# Altium PCB PCB1.PcbDoc (part 1 of 2)
Units mm, origin at the board's own origin, x right, y up, seen from the top; angles counter-clockwise.
Board outline 100 x 91 mm, 2 copper layers (Top Layer, Bottom Layer); 156 components, 114 nets, 531 pads, 381 vias.
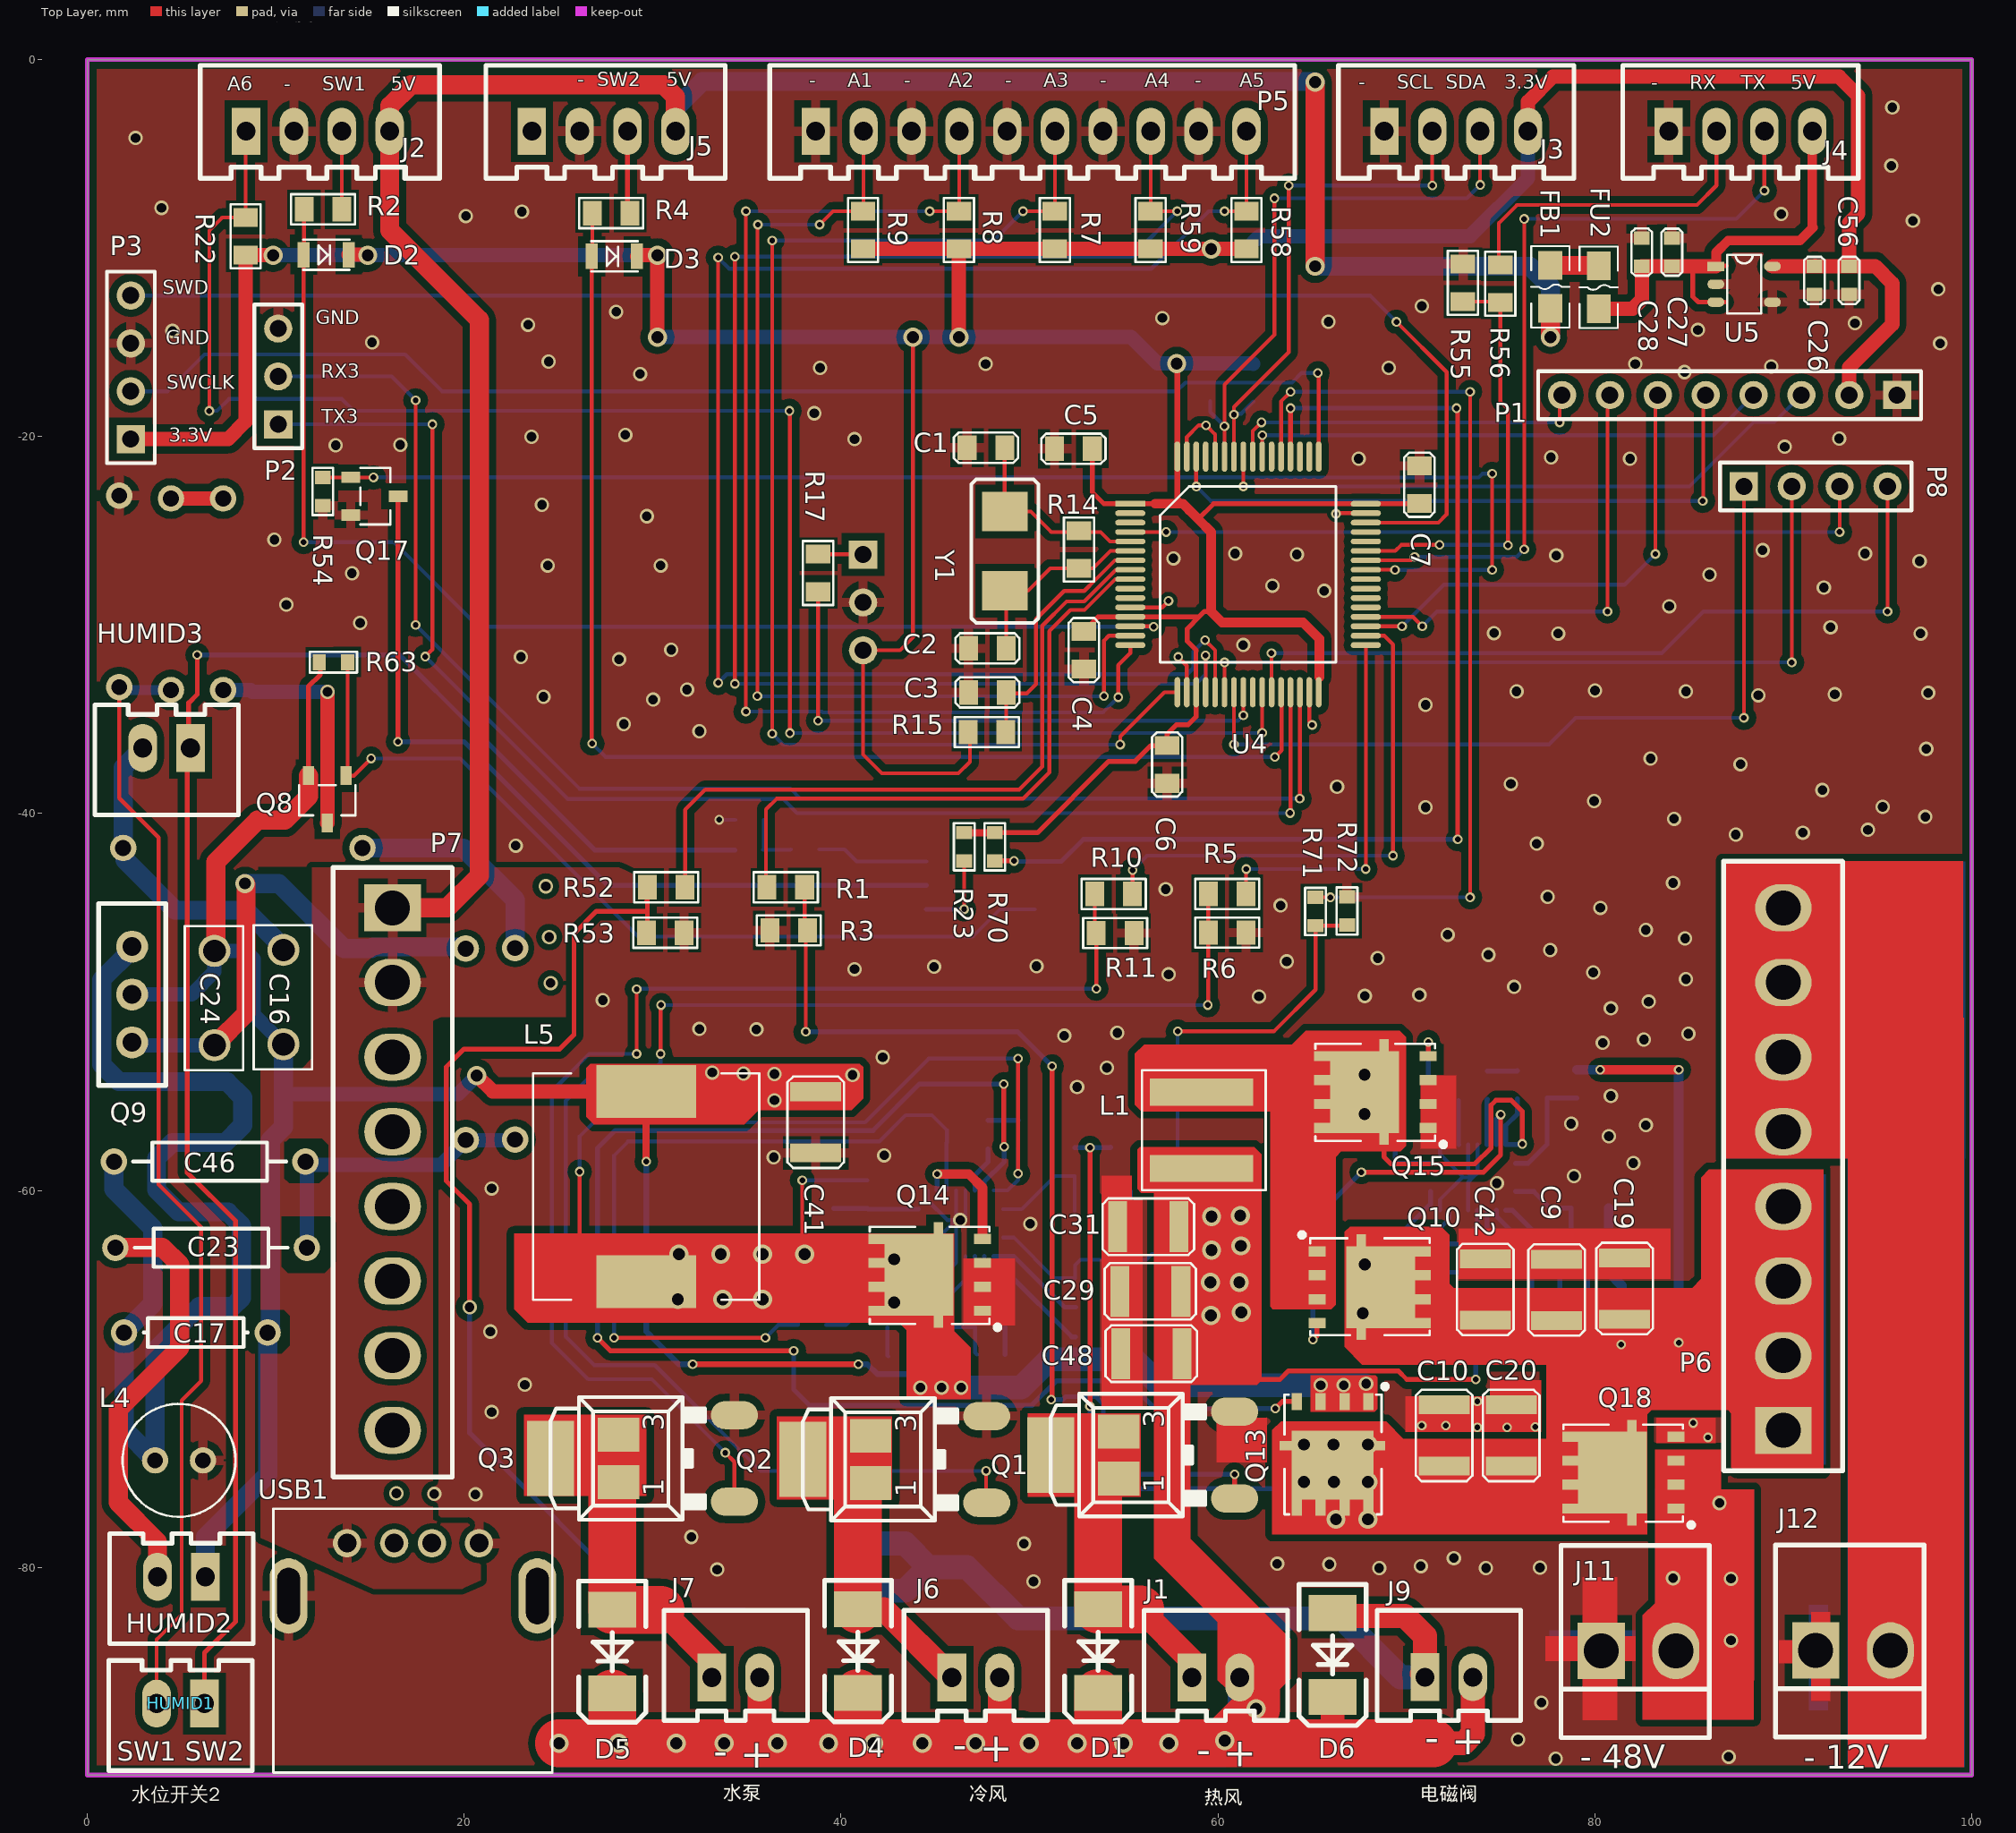
[diagram p0: Top Layer view]
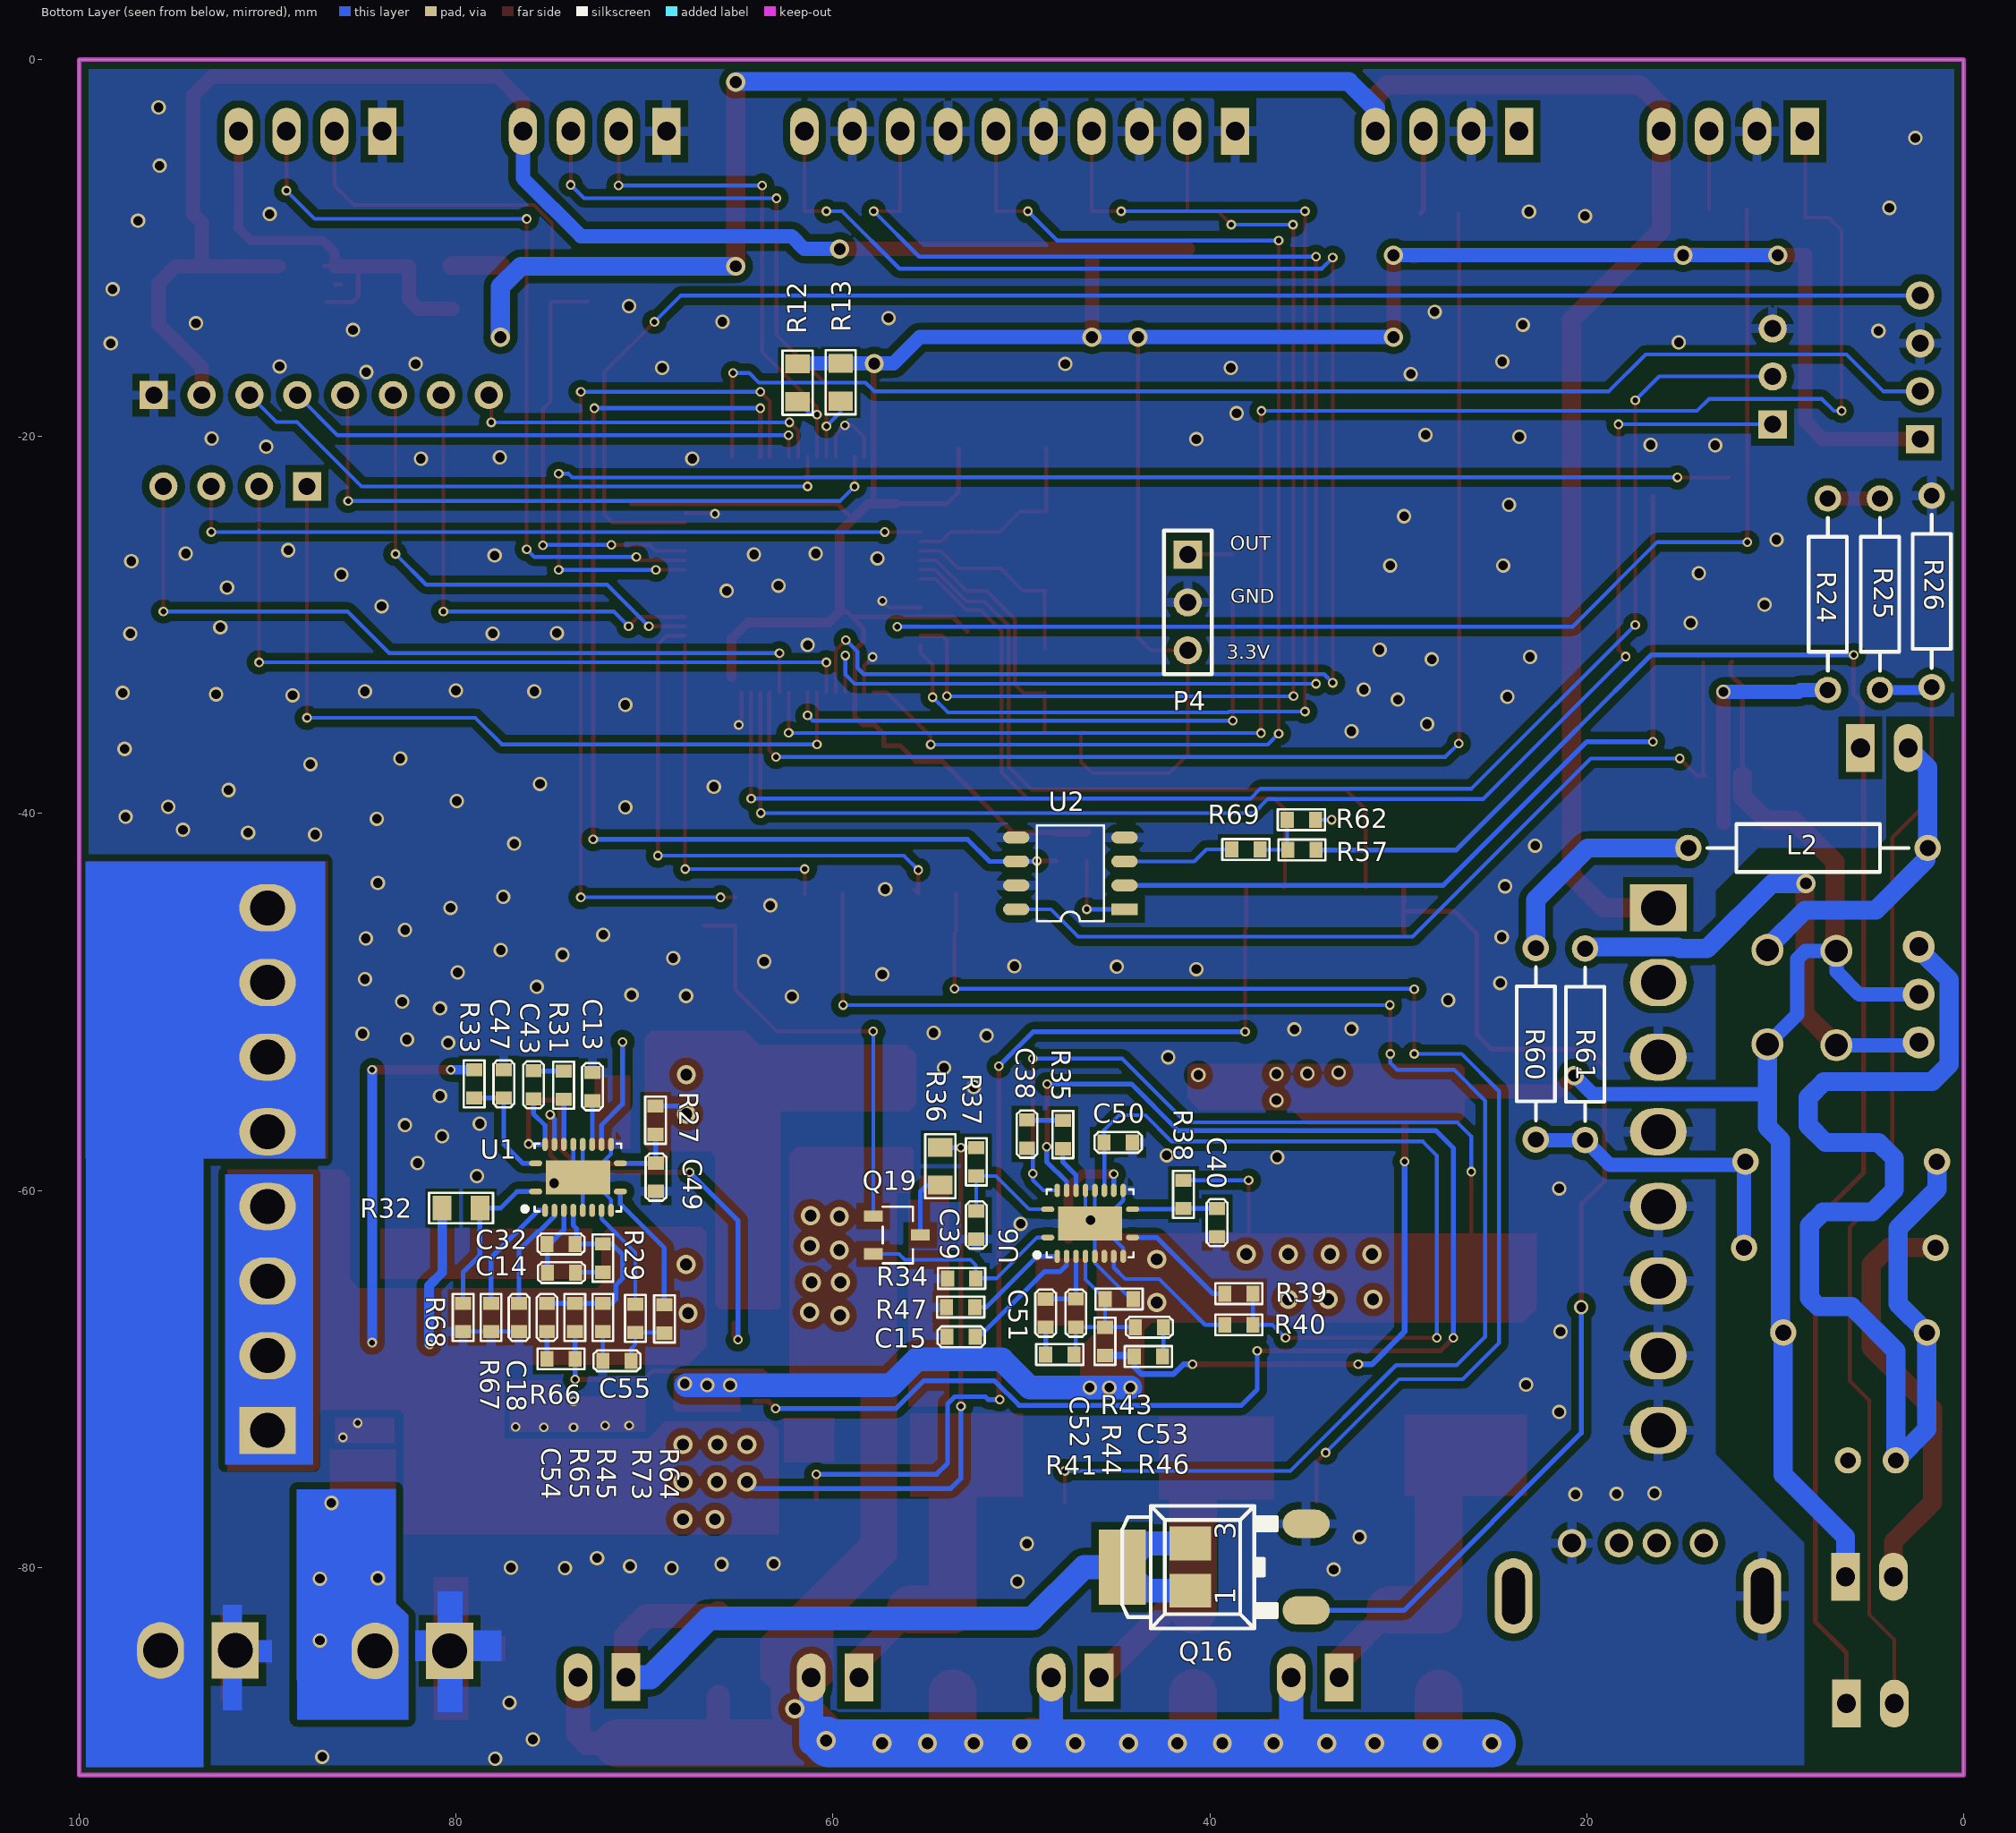
[diagram p1: Bottom Layer view, seen from below]

## Layer stack, top to bottom
Top Layer: signal copper 0.0356
Dielectric: dielectric 0.32, FR-4, Dk 4.8
Bottom Layer: signal copper 0.0356

## Board outline
0,-91.008 100,-91.008 100,-0.008 0,-0.008

## Design rules (kind name [scope] priority, off if disabled: settings)
Clearance Clearance_2 [InNet('+5V')  And InPolygon] p1: gap=0.305
Clearance Clearance_1 [InPoly And InNet(GND)] p2: gap=0.381
Clearance [All] p3: gap=0.127
MinimumSolderMaskSliver [All] p1: minsoldermaskwidth=0.025
PolygonConnect PolygonConnect_1 [IsVia] p1: connectstyle=Direct reliefconductorwidth=0.254 reliefentries=4 polygonreliefangle="90 Angle"
PolygonConnect [All] p2: connectstyle=Relief reliefconductorwidth=0.508 reliefentries=4 polygonreliefangle="90 Angle"
RoutingVias [All] p1: holewidth=0.711 width=1.27 viastyle="Through Hole" minholewidth=0.711 minwidth=1.27 maxholewidth=0.711 maxwidth=1.27
SilkToSilkClearance [All] p1: silktosilkclearance=0.025
SilkscreenOverComponentPads [All] p1: minsilkscreentomaskgap=0.025
SolderMaskExpansion [All] p1: expansion=0.102
Width [All] p1: maxlimit=5.08 minlimit=0.152 preferedwidth=0.254
25 further rules are at their usual default settings.

## Classes and differential pairs
component class Humidifier: C10 C15 C16 C17 C20 C23 C24 C38 C39 C40 C41 C46 C50 C51 C52 C53 HUMID1 HUMID2 HUMID3 J11 L2 L4 L5 Q8 Q9 Q13 Q14 Q17 Q18 Q19 R23 R24 R25 R26 R34 R35 R36 R37 R38 R39 R40 R41 R43 R44 R46 R47 R54 R57 R60 R61 R62 R63 R69 R70 R71 R72 U2 U6
component class cpu: C1 C2 C3 C4 C5 C6 C7 P1 P2 P3 P4 P8 R12 R13 R14 R15 R17 R55 R56 U4 Y1
component class Connector: D1 D2 D3 D4 D5 D6 J1 J2 J3 J4 J5 J6 J7 J9 P5 Q1 Q2 Q3 Q16 R1 R2 R3 R4 R5 R6 R7 R8 R9 R10 R11 R22 R52 R53 R58 R59
component class POWER: C9 C13 C14 C18 C19 C25 C26 C27 C28 C29 C31 C32 C42 C43 C47 C48 C49 C54 C55 C56 FB1 FU2 J12 L1 P6 P7 Q10 Q15 R27 R28 R29 R31 R32 R33 R45 R64 R65 R66 R67 R68 R73 U1 U5 USB1

## Components (designator, comment, footprint, x,y, rotation, side; value= is the part's Value field where it differs from the comment)
C1 "22pF" 0805c 46.685,-20.599 r0 top
C2 "22pF" 0805c 46.761,-31.242 r0 top
C3 "100nF" 0805c 46.761,-33.579 r0 top
C4 "100nF" 0805c 52.883,-32.334 r90 top
C5 "100nF" 0805c 51.333,-20.65 r0 top
C6 "100nF" 0805c 57.302,-38.405 r90 top
C7 "100nF" 0805c 70.688,-21.565 r270 top
C9 "GRM32ER72A225KA35L" 1210C 77.972,-66.904 r90 top
C10 "GRM32ER72A225KA35L" 1210C 72.003,-74.625 r90 top
C13 "EMK107BB7225MA-T" 0603C 72.765,-55.245 r90 bottom
C14 "18nF/16V" 0603C 75.153,-64.364 r180 bottom
C15 "18nF/16V" 0603C 52.445,-67.767 r0 bottom
C16 "10nF/630V" CAP_5MM 10.408,-47.244 r270 top
C17 "1.5nF/630V" AXIAL-0.3 5.76,-67.539 r0 top
C18 "18nF/16V" 0603C 76.658,-65.988 r270 bottom
C19 "GRM32ER72A225KA35L" 1210C 81.579,-66.827 r90 top
C20 "GRM32ER72A225KA35L" 1210C 75.559,-74.625 r90 top
C23 "47nF/630V" AXIAL-0.4 6.573,-63.043 r180 top
C24 "100p/1000v" CAP_5MM 6.751,-47.295 r270 top
C26 "10uF/10V" 0603C 91.653,-12.471 r90 top
C27 "10uF/10V" 0603C 84.089,-9.474 r270 top
C28 "0.1uF/10V" 0603C 82.489,-10.973 r90 top
C29 "GRM32ER71A476KE15L" 1210C 58.033,-65.354 r180 top
C31 "GRM32ER71A476KE15L" 1210C 57.932,-61.925 r180 top
C32 "1pF/16V" 0603C 75.178,-62.84 r180 bottom
C38 "0.1uF/25V" 0603C 49.702,-56.261 r270 bottom
C39 "C1608X7S2A104K080AB" 0603C 52.394,-62.586 r90 bottom
C40 "3pF/100V" 0603C 39.618,-62.459 r90 bottom
C41 "GRM32ER71A476KE15L" 1210C 38.653,-54.762 r270 top
C42 "GRM32ER72A225KA35L" 1210C 74.188,-66.878 r90 top
C43 "0.1uF/25V" 0603C 75.889,-53.645 r270 bottom
C46 "47nF/630V" AXIAL-0.4 6.497,-58.471 r180 top
C47 "C1608X7S2A104K080AB" 0603C 77.464,-53.594 r270 bottom
C48 "GRM32ER71A476KE15L" 1210C 58.084,-68.656 r180 top
C49 "6.8pF/100V" 0603C 69.387,-60.046 r90 bottom
C50 "EMK107BB7225MA-T" 0603C 45.613,-57.455 r180 bottom
C51 "22nF/16V" 0603C 48.711,-65.761 r270 bottom
C52 "1pF/16V" 0603C 47.111,-65.759 r270 bottom
C53 "1.5nF/16V" 0603C 43.962,-67.258 r180 bottom
C54 "470pF/16V" 0603C 75.175,-65.988 r270 bottom
C55 "2.2uF/16V" 0603C 70.714,-69.037 r0 bottom
C56 "0.1uF/10V" 0603C 93.487,-10.971 r270 top
D1 "1N4004" D7227 53.638,-82.22 r270 top
D2 "1N4148" sod323 11.475,-10.363 r0 top
D3 "1N4148" sod323 26.772,-10.439 r0 top
D4 "1N4004" D7227 40.901,-82.22 r270 top
D5 "1N4004" D7227 27.858,-82.245 r270 top
D6 "1N4004" D7227 66.085,-82.423 r270 top
FB1 "100R1A" F0805 77.638,-13.208 r90 top
FU2 "500mA/6V" F0805 80.203,-10.947 r270 top
HUMID1 "Header 2" SIP-2L 4.947,-87.224 r180 top
HUMID2 "Header 2" SIP-2L 4.998,-80.493 r180 top
HUMID3 "" SIP-2L 4.211,-36.525 r180 top
J1 "OUT-A" SIP-2L 59.887,-85.839 r0 top
J2 "IIC" SIP-4L 8.427,-3.81 r0 top
J3 "IIC" SIP-4L 68.828,-3.81 r0 top
J4 "USRT" SIP-4L 83.916,-3.81 r0 top
J5 "IIC" SIP-4L 23.591,-3.81 r0 top
J6 "OUT-B" SIP-2L 47.149,-85.839 r0 top
J7 "OUT-C" SIP-2L 34.411,-85.839 r0 top
J9 "OUT-C" SIP-2L 72.257,-85.827 r0 top
J11 "SIP2-2.54" CH3.96-2P 84.297,-84.43 r0 top
J12 "OUT-B" CH3.96-2P 95.682,-84.404 r0 top
L1 "XAL6060-682MEB" XAL6060 59.125,-54.788 r270 top
L2 "100uH" AXIAL-0.5 8.255,-41.834 r180 bottom
L4 "47uH" 6*8 4.871,-74.32 r180 top
L5 "SRR1210-560M" SRR1210 29.661,-64.846 r90 top
P1 "Header 8" HDR1X8 96.037,-17.805 r180 top
P2 "Header 3" HDR1X3 10.135,-19.355 r90 top
P3 "Header 4" HDR1X4 2.311,-20.142 r90 top
P4 "Header 3" HDR1X3 41.168,-26.264 r270 bottom
P5 "Header 10" SIP-10L 38.653,-3.81 r0 top
P6 "Header 8" CH3.96-8P 90,-72.728 r90 top locked
P7 "Header 8" CH3.96-8P 16.2,-45.008 r270 top locked
P8 "Header 4" HDR1X4 87.909,-22.651 r0 top
Q1 "NCE4060K" TO-252-3S 54.63,-74.041 r90 top
Q2 "NCE4060K" TO-252-3S 41.472,-74.27 r90 top
Q3 "NCE4060K" TO-252-3S 28.087,-74.219 r90 top
Q8 "SI2343" SOT23-3 13.736,-37.998 r90 top
Q9 "BU406" to220 2.382,-52.146 r90 top
Q10 "BSC117N08NS5ATMA1" "PowerPAK SO-8" 64.307,-62.56 r0 top
Q13 "BSC117N08NS5ATMA1" "PowerPAK SO-8" 68.655,-70.249 r270 top
Q14 "BSC037N08NS5ATMA1" "PowerPAK SO-8" 48.457,-67.056 r180 top
Q15 "BSC037N08NS5ATMA1" "PowerPAK SO-8" 72.105,-57.353 r180 top
Q16 "NCE4060K" TO-252-3S 41.142,-79.985 r90 bottom
Q17 "S8050" SOT23-3 13.99,-22.174 r180 top
Q18 "SI7489DP" "PowerPAK SO-8" 85.262,-77.546 r180 top
Q19 "S8050" SOT23-3 57.861,-61.366 r0 bottom
R1 "22R" 0805R 36.068,-43.917 r0 top
R2 "10K" 0805R 13.507,-7.95 r180 top
R3 "470K" 0805R 36.22,-46.203 r0 top
R4 "10K" 0805R 28.804,-8.153 r180 top
R5 "22R" 0805R 61.488,-44.272 r180 top
R6 "470k" 0805R 61.488,-46.323 r180 top
R7 "10K" 0805R 51.34,-8.052 r270 top
R8 "10K" 0805R 46.254,-8.052 r270 top
R9 "10K" 0805R 41.168,-8.052 r270 top
R10 "22R" 0805R 55.468,-44.272 r180 top
R11 "470k" 0805R 55.544,-46.348 r180 top
R12 "2K" 0805R 61.874,-16.154 r270 bottom
R13 "2K" 0805R 59.588,-16.129 r270 bottom
R14 "1MR" 0805R 52.629,-27 r90 top
R15 "10K" 0805R 46.736,-35.687 r0 top
R17 "100" 0805R 38.78,-28.245 r90 top
R22 "10K" 0805R 8.402,-8.382 r270 top
R23 "100" 0603R 46.533,-42.519 r90 top
R24 "1.2K" AXIAL-0.4 7.208,-28.372 r270 bottom
R25 "1.2K" AXIAL-0.4 4.439,-28.372 r270 bottom
R26 "4.7K" AXIAL-0.4 1.696,-28.219 r270 bottom
R27 "1.65K" 0603R 69.412,-55.524 r270 bottom
R29 "2.37K" 0603R 72.206,-62.84 r270 bottom
R31 "0" 0603R 74.289,-53.67 r270 bottom
R32 "121K" 0805R 78.734,-60.935 r0 bottom
R33 "2.2" 0603R 79.039,-53.594 r270 bottom
R34 "8.06K" 0603R 53.918,-64.668 r180 bottom
R35 "0" 0603R 47.797,-56.286 r270 bottom
R36 "121K" 0805R 54.299,-59.715 r90 bottom
R37 "2.2" 0603R 52.394,-57.734 r270 bottom
R38 "2.1K" 0603R 41.396,-59.461 r270 bottom
R39 "20K" 0603R 39.212,-65.481 r180 bottom
R40 "20K" 0603R 39.212,-67.132 r180 bottom
R41 "4.99K" 0603R 47.213,-68.706 r0 bottom
R43 "665" 0603R 45.562,-65.759 r180 bottom
R44 "18K" 0603R 45.562,-68.756 r90 bottom
R45 "1.27K" 0603R 72.21,-65.988 r270 bottom
R46 "4.64" 0603R 44.012,-68.807 r180 bottom
R47 "39.2K" 0603R 53.969,-66.192 r180 bottom
R52 "22R" 0805R 31.725,-43.917 r180 top
R53 "470k" 0805R 31.674,-46.33 r180 top
R54 "4.7K" 0603r 12.497,-23.673 r90 top
R55 "20K" 0805R 73,-10.846 r270 top
R56 "10K" 0805R 74.981,-10.897 r270 top
R57 "100k" 0603r 35.865,-41.935 r180 bottom
R58 "10K" 0805R 61.513,-8.052 r270 top
R59 "10K" 0805R 56.427,-10.052 r90 top
R60 "10" AXIAL-0.4 22.702,-52.222 r90 bottom
R61 "2.2" AXIAL-0.4 20.086,-52.248 r90 bottom
R62 "20K" 0603r 34.392,-40.335 r0 bottom
R63 "1K" 0603R 13.812,-31.979 r180 top
R64 "20K" 0603R 68.936,-66.065 r270 bottom
R65 "18K" 0603R 73.692,-67.488 r90 bottom
R66 "19.1" 0603R 73.68,-68.936 r0 bottom
R67 "28.7K" 0603R 78.14,-67.488 r90 bottom
R68 "8.06K" 0603R 79.623,-67.488 r90 bottom
R69 "1K" 0603R 38.837,-41.91 r180 bottom
R70 "100" 0603R 48.158,-42.519 r90 top
R71 "1K" 0603R 65.176,-44.45 r270 top
R72 "20K" 0603R 66.853,-45.923 r90 top
R73 "20K" 0603R 70.485,-66.04 r270 bottom
U1 "LM5145" QFN050P600-8N 73.527,-59.309 r90 bottom
U2 "TLP521-2" SO-8 44.526,-45.085 r0 bottom
U4 "STM32F103R8T6" LQFP-64 55.347,-23.571 r0 top
U5 "TLV70233DBVR" SOT23-5(DBV) 86.42,-10.973 r0 top
U6 "LM5145" QFN050P600-8N 46.349,-61.747 r90 bottom
USB1 "Header 5" USB-A 13.786,-78.715 r0 top
Y1 "8MHz" SMT5032 48.692,-26.086 r90 top

## Footprints (in the part's own frame and the unit in brackets; to place one, negate y for a bottom-side part, rotate by r counter-clockwise, add the part's x,y. Pads: shape width x height; smd on the part's side, far side on the other; paste and mask are expansions set on the pad)
6*8 [mil]
  round 55 hole 33: 1(50,0) 2(-50,0)
  silkscreen extent -118,-118 118,118
0603C [mm]
  rect 0.7x0.85 smd: 1(0,0) 2(1.5,0)
  silkscreen extent -0.5,-0.55 2,0.55
0603R [mm]
  rect 0.7x0.85 smd: 1(0,0) 2(1.5,0)
  silkscreen extent -0.5,-0.55 2,0.55
0603r [mm]
  rect 0.7x0.85 smd: 1(0,0) 2(1.5,0)
  silkscreen extent -0.5,-0.55 2,0.55
0805c [mm]
  rect 1x1.3 smd: 1(0,0) 2(2,0)
  silkscreen extent -0.7,-0.8 2.7,0.8
0805R [mm]
  rect 1x1.3 smd: 1(0,0) 2(2,0)
  silkscreen extent -0.7,-0.8 2.7,0.8
1210C [mm]
  rect 1x2.7 smd: 1(0,0) 2(3.25,0)
  silkscreen extent -0.8,-1.5 4.05,1.5
AXIAL-0.3 [mm] "Axial Device, Thru-Hole; 2 Leads; 0.3 in Pin Spacing"
  round 1.4 hole 0.85: 1(-3.81,0) 2(3.81,0)
  silkscreen extent -2.77,-0.76 2.77,0.76
AXIAL-0.4 [mm] "Axial Device, Thru-Hole; 2 Leads; 0.4 in Pin Spacing"
  round 1.4 hole 0.85: 1(-5.08,0) 2(5.08,0)
  silkscreen extent -4.06,-1.02 4.06,1.02
AXIAL-0.5 [mm] "Axial Device, Thru-Hole; 2 Leads; 0.5 in Pin Spacing"
  round 1.4 hole 0.85: 1(-6.35,0) 2(6.35,0)
  silkscreen extent -5.33,-1.27 5.33,1.27
CAP_5MM [mm]
  round 1.7 hole 1.2: 1(0,0) 2(5,0)
  silkscreen extent -1.32,-1.57 6.32,1.52
CH3.96-2P [mm]
  rect 2.5x3 hole 1.85: 1(-3.96,0)
  oval 2.5x3 hole 1.85: 2(0,0)
  silkscreen extent -6.1,-4.6 1.78,5.59, body extent -5.94,-3.91 1.92,4.59, height 10.9
CH3.96-8P [mm]
  rect 2.5x3 hole 1.85: 1(0,0)
  oval 2.5x3 hole 1.85: 2(3.96,0) 3(7.92,0) 4(11.88,0) 5(15.84,0) 6(19.8,0) 7(23.76,0) 8(27.72,0)
  silkscreen extent -2.14,-3.15 30.2,3.18
D7227 [mm]
  rect 1.905x2.54 smd: A(0,0) K(4.445,0)
  silkscreen extent -1.52,-1.78 5.97,1.78, body extent -0.56,-1.45 4.93,1.35, height 2.24
F0805 [mil]
  rect 60x50 smd: 1(0,0) 2(90,0)
  silkscreen extent -40,-40 130,40, body extent 4,-23 82,24, height 20
HDR1X3 [mm] "Connector; Header; 3 Position"
  rect 1.5x1.5 hole 0.9: 1(0,0)
  round 1.5 hole 0.9: 2(2.54,0) 3(5.08,0)
  silkscreen extent -1.27,-1.27 6.35,1.27
HDR1X4 [mm] "Connector; Header; 4 Position"
  rect 1.5x1.5 hole 0.9: 1(0,0)
  round 1.5 hole 0.9: 2(2.54,0) 3(5.08,0) 4(7.62,0)
  silkscreen extent -1.27,-1.27 8.89,1.27
HDR1X8 [mm] "Connector; Header; 8 Position"
  rect 1.5x1.5 hole 0.9: 1(0,0)
  round 1.5 hole 0.9: 2(2.54,0) 3(5.08,0) 4(7.62,0) 5(10.16,0) 6(12.7,0) 7(15.24,0) 8(17.78,0)
  silkscreen extent -1.27,-1.27 19.05,1.27
LQFP-64 [mm]
  rect 1.6x0.3 smd: 1(0,0)
  oval 1.6x0.3 smd: 2(0,-0.5) 3(0,-1) 4(0,-1.5) 5(0,-2) 6(0,-2.5) 7(0,-3) 8(0,-3.5) 9(0,-4) 10(0,-4.5) 11(0,-5) 12(0,-5.5) 13(0,-6) 14(0,-6.5) 15(0,-7) 16(0,-7.5) 33(12.5,-7.5) 34(12.5,-7) 35(12.5,-6.5) 36(12.5,-6) 37(12.5,-5.5) 38(12.5,-5) 39(12.5,-4.5) 40(12.5,-4) 41(12.5,-3.5) 42(12.5,-3) 43(12.5,-2.5) 44(12.5,-2) 45(12.5,-1.5) 46(12.5,-1) 47(12.5,-0.5) 48(12.5,0)
  oval 0.3x1.6 smd: 17(2.5,-10) 18(3,-10) 19(3.5,-10) 20(4,-10) 21(4.5,-10) 22(5,-10) 23(5.5,-10) 24(6,-10) 25(6.5,-10) 26(7,-10) 27(7.5,-10) 28(8,-10) 29(8.5,-10) 30(9,-10) 31(9.5,-10) 32(10,-10) 49(10,2.5) 50(9.5,2.5) 51(9,2.5) 52(8.5,2.5) 53(8,2.5) 54(7.5,2.5) 55(7,2.5) 56(6.5,2.5) 57(6,2.5) 58(5.5,2.5) 59(5,2.5) 60(4.5,2.5) 61(4,2.5) 62(3.5,2.5) 63(3,2.5) 64(2.5,2.5)
  silkscreen extent 1.59,-8.41 10.91,0.91
"PowerPAK SO-8" [mm]
  rect 0.9x0.54 smd: 1(0.95,-0.67) 2(0.95,-1.94) 3(0.95,-3.21) 4(0.95,-4.48) 5(6.548,-4.48) 6(6.548,-3.21) 7(6.548,-1.94) 8(6.548,-0.67)
  rect 0.5x1.6 smd: 5(3.3,-4.575) 8(3.3,-0.575)
  rect 3.66x2.5 smd: 5(4.325,-3.495)
  rect 3.66x2 smd: 8(4.325,-1.401)
  silkscreen extent 0.03,-5.12 6.93,0.33
QFN050P600-8N [mm]
  oval 0.3x0.7 smd: 1(-0.75,2.25) 10(-0.75,-2.25) 11(0.75,-2.25) 20(0.75,2.25)
  oval 0.7x0.3 smd: 2(-1.75,1.75) 3(-1.75,1.25) 4(-1.75,0.75) 5(-1.75,0.25) 6(-1.75,-0.25) 7(-1.75,-0.75) 8(-1.75,-1.25) 9(-1.75,-1.75) 12(1.75,-1.75) 13(1.75,-1.25) 14(1.75,-0.75) 15(1.75,-0.25) 16(1.75,0.25) 17(1.75,0.75) 18(1.75,1.25) 19(1.75,1.75)
  rect 1.8x3.4 smd: 21(0,0)
  silkscreen extent -1.8,-2.3 1.8,2.94, body extent -1.8,-2.3 1.8,2.3, height 0.8
SIP-2L [mil]
  rect 60x100 hole 40: 1(-50,0)
  oval 60x100 hole 40: 2(50,0)
  silkscreen extent -150,-90 150,140
SIP-4L [mm]
  rect 1.5x2.5 hole 1: 1(0,0)
  oval 1.5x2.5 hole 1: 2(2.54,0) 3(5.08,0) 4(7.62,0)
  silkscreen extent -2.44,-2.5 10.26,3.5
SIP-10L [mm]
  rect 1.5x2.5 hole 1: 1(0,0)
  oval 1.5x2.5 hole 1: 2(2.54,0) 3(5.08,0) 4(7.62,0) 5(10.16,0) 6(12.7,0) 7(15.24,0) 8(17.78,0) 9(20.32,0) 10(22.86,0)
  silkscreen extent -2.44,-2.5 25.43,3.5
SMT5032 [mm]
  rect 2.1x2.4 smd: 1(-2.1,0) 2(2.1,0)
  silkscreen extent -3.81,-1.78 3.81,1.78
SO-8 [mil]
  rect 55x25 smd: 1(0,0)
  oval 55x25 smd: 2(0,-50) 3(0,-100) 4(0,-150) 5(226.38,-150) 6(226.38,-100) 7(226.38,-50) 8(226.38,0)
  silkscreen extent 43,-175 183,25
sod323 [mm]
  rect 0.65x1.35 smd: A(0,0) K(2.4,0)
  silkscreen extent -0.03,-0.8 2.44,0.8
SOT23-3 [mm]
  rect 1x0.6 smd: 1(0,0) 2(0,2) 3(-2.5,1)
  silkscreen extent -2.1,-0.5 -0.5,2.5
SOT23-5(DBV) [mm]
  rect 0.9x0.5 smd: 1(0,0)
  oval 0.9x0.5 smd: 2(0,-0.95) 3(0,-1.9) 4(3,-1.9) 5(3,0)
  silkscreen extent 0.6,-2.5 2.4,0.6
SRR1210 [mm]
  rect 2.8x5.3 smd: 1(0,0) 2(10.1,0)
  silkscreen extent -0.95,-6 11.05,6
to220 [mm]
  round 1.7 hole 1: 1(0,0) 2(2.54,0) 3(5.08,0)
  silkscreen extent -2.29,-1.78 7.37,1.78
TO-252-3S [mm]
  oval 1.5x2.5 smd: 1(-2.3,-6.25) 3(2.3,-6.25)
  rect 1.8x2.2 smd: 2(-1.25,-0.1) 2(1.25,-0.1)
  rect 4x2.5 smd: 2(0,3.5)
  silkscreen extent -3.25,-4.7 3.25,3.5
USB-A [mm]
  round 1.5 hole 1: 1(0,0) 2(2.5,0) 3(4.5,0) 4(7,0)
  oval 2x4 hole 1.2 slot 3 at 90 deg: 5(-3.1,-2.8) 6(10.1,-2.8)
  silkscreen extent -3.91,-12.17 10.89,1.83
XAL6060 [mm]
  rect 1.43x5.5 smd: 1(0,0) 2(4.04,0)
  silkscreen extent -1.17,-3.15 5.19,3.41

## Part data
C1 C2 C3 C4 C5 C6 C7: library part CAP, "Capacitor"
C9 C10 C13 C14 C15 C18 C19 C20 C29 C31 C32 C38 C39 C40 C41 C42 C43 C47 C48 C49 C50 C51 C52 C53 C54 C55: library part 0.01UF, "CCX85-103"
C16 C17 C23 C24 C26 C27 C28 C46 C56: library part Cap, "Capacitor"
D1 D4 D5 D6: library part Diode_2, "Default Diode"
D2 D3: library part Diode, "Default Diode"
FB1 FU2: library part FUSE2, "Fuse"
HUMID1 HUMID2: "Header, 2-Pin"
HUMID3: library part "Header 2", "Header, 2-Pin"
J1 J6 J7 J9 J12: library part CON2, "Connector"
J2 J3 J4 J5: library part SIP4-2.54, "CN-SIP4-2.54"
J11: "CN-SIP2-2.54"
L1 L5: library part INDUCTOR
L2 L4: library part Inductor, "Inductor"
P1 P6 P7: "Header, 8-Pin"
P2 P4: "Header, 3-Pin"
P3 P8: "Header, 4-Pin"
P5: "Header, 10-Pin"
Q1 Q2 Q3 Q16: "NMOSFET"
Q8: library part BUK92150-55A, "BUK92150-55A"
Q9: library part NPN, "NPN Bipolar Transistor"
Q10 Q13 Q14 Q15 Q18: library part Si4004DY, "Si4004DY"
Q17 Q19: library part NPN
R1 R2 R3 R4 R5 R6 R7 R8 R9 R10 R11 R22 R52 R53 R58 R59: library part 1K, "CR85-102J"
R12 R13 R14 R15 R17 R27 R29 R31 R35 R38 R41 R43 R44 R45 R46 R55 R56 R65 R66: library part Res3, "Resistor"
R23 R63 R69 R70: library part R, "R"
R24 R25 R26 R32 R33 R34 R36 R37 R39 R40 R47 R54 R57 R60 R61 R62 R64 R67 R68 R71 R72 R73: library part "Res Semi", "Semiconductor Resistor"
U4: "STM32 ARM-based 32-bit MCU with 64 Kbytes Flash, 64-pin LQFP, Industrial Temperature"
U5: library part TLV70230DBVR
USB1: "Header, 5-Pin"
Y1: library part XTAL, "Crystal Oscillator"

## Via types
v1: diameter 0.762, hole 0.508, Top Layer to Bottom Layer, tented both sides, 182 vias
v2: diameter 0.508, hole 0.305, Top Layer to Bottom Layer, tented both sides, 142 vias
v3: diameter 1.016, hole 0.635, Top Layer to Bottom Layer, tented both sides, 57 vias

## Nets (pads, with @x,y where several pads share a name; then routed paths per layer and width w, separated by ;. In a path a pad name is that pad's centre, name@x,y a point inside that pad or via, vN(x,y) a via of type N, cw(c..) or ccw(c..) an arc to the next point about the centre after c; other vN are vias at no path point)
+5V: FB1.1 J2.4 J5.4 P7.1 P7.2 USB1.1 | length 128.9
  Top Layer w0.762: J2.4@16.047,-3.81 J2.4@16.149,-3.708 ; P7.1@16.2,-45.008 P7.1@16.353,-45.161
  Top Layer w1.016: P7.1@16.2,-45.008 19.101,-45.008 20.803,-43.307 20.803,-13.818 16.047,-9.062 J2.4@16.047,-3.81 16.047,-2.47 17.17,-1.346 30.582,-1.346 31.211,-1.975 J5.4@31.211,-3.81 ; v3(65.151,-10.973) v3(65.151,-1.194) ; FB1.1@77.638,-13.208 77.638,-14.722 v3(77.648,-14.732)
  Bottom Layer w1.016: J5.4@31.211,-3.81 31.211,-2.597 32.639,-1.168 65.126,-1.168 v3(65.151,-1.194) ; v3(65.151,-10.973) 76.553,-10.973 77.638,-12.058 77.638,-14.722 v3(77.648,-14.732)
+12V: C29.1 C31.1 C48.1 D1.K D4.K D5.K D6.K J1.2 J6.2 J7.2 J9.2 L1.2 R65.1 R66.1 | length 136.2
  Top Layer w0.254: 61.564,-69.748 61.843,-70.028 63.291,-70.028 63.748,-69.571 69.565,-69.571 70.022,-70.028 v2(73.68,-70.028)
  Top Layer w1.27: 35.681,-89.332 J7.2@35.681,-85.839 ; 48.419,-89.332 J6.2@48.419,-85.839 ; D6.K@66.085,-86.868 66.085,-89.103 66.314,-89.332 ; 71.419,-89.332 73.022,-89.332 73.527,-88.827 J9.2@73.527,-85.827
  Top Layer w2.54: v3(25.039,-89.332) 27.655,-89.332 ; D5.K@27.858,-86.69 27.858,-89.129 27.655,-89.332 ; v3@36.57,-89.281 v3@36.519,-89.332 ; D4.K@40.901,-86.665 40.901,-89.142 40.71,-89.332 ; 49.448,-89.23 49.346,-89.332 ; 53.638,-89.256 D1.K@53.638,-86.665 ; 62.021,-84.404 v3(62.021,-87.503) v3@60.192,-89.332 ; 71.419,-89.332 66.314,-89.332 v3@60.192,-89.332 ; 27.655,-89.332 v3(28.188,-89.332) v3(31.262,-89.332) v3(33.802,-89.332) 35.681,-89.332 v3@36.519,-89.332 ; v3@36.519,-89.332 v3(36.621,-89.332) v3(39.339,-89.332) 40.71,-89.332 ; 40.71,-89.332 v3(41.726,-89.332) v3(44.317,-89.332) v3(47.137,-89.332) 48.419,-89.332 49.346,-89.332 ; 49.346,-89.332 v3(49.981,-89.332) v3(52.521,-89.332) v3(54.985,-89.332) v3(57.398,-89.332) v3@60.192,-89.332
  Bottom Layer w0.254: v2(73.68,-70.028) R66.1@73.68,-68.936 73.68,-67.5 R65.1@73.692,-67.488
  Bottom Layer w1.27: 35.681,-89.332 J7.2@35.681,-85.839 ; 48.419,-89.332 J6.2@48.419,-85.839 ; 61.157,-89.332 J1.2@61.157,-85.839
  Bottom Layer w2.54: v3(25.039,-89.332) v3(28.188,-89.332) v3(31.262,-89.332) v3(33.802,-89.332) 35.681,-89.332 v3(36.621,-89.332) v3(39.339,-89.332) v3(41.726,-89.332) v3(44.317,-89.332) v3(47.137,-89.332) 48.419,-89.332 v3(49.981,-89.332) v3(52.521,-89.332) v3(54.985,-89.332) v3(57.398,-89.332) 60.218,-89.332 v3(60.362,-89.187)
  other v3: 59.633,-66.624 61.234,-66.472 59.608,-64.872 61.132,-64.872 59.659,-63.17 61.208,-62.941 59.659,-61.392 61.183,-61.341
+48V: J11.2 Q18.1 Q18.2 Q18.3
  other v1: 87.224,-83.871 87.224,-80.594 84.15,-80.569 86.614,-76.581
A1: P5.2 R9.1 U4.15 | length 58
  Top Layer w0.203: v2(35.56,-33.782) 35.56,-8.788 v2(35.585,-8.763) ; v2(38.862,-8.763) 39.573,-8.052 R9.1@41.168,-8.052 41.193,-8.026 P5.2@41.193,-3.81 ; v2(53.95,-33.782) 53.95,-30.836 54.214,-30.571 U4.15@55.347,-30.571
  Bottom Layer w0.203: v2(35.56,-33.782) v2(53.95,-33.782) ; v2(35.585,-8.763) v2(38.862,-8.763)
A2: P5.4 R8.1 U4.16 | length 65.2
  Top Layer w0.203: v2(34.95,-34.595) v2(34.95,-8.052) ; v2(44.704,-8.052) R8.1@46.254,-8.052 46.273,-8.033 P5.4@46.273,-3.81 ; v2(54.712,-33.833) 54.712,-32.131 55.347,-31.496 U4.16@55.347,-31.071
  Bottom Layer w0.203: v2(34.95,-34.595) 38.98,-34.595 39.031,-34.646 53.899,-34.646 v2(54.712,-33.833) ; v2(34.95,-8.052) v2(44.704,-8.052)
A3: P5.6 R7.1 U4.17 | length 69.2
  Top Layer w0.203: v2(36.347,-35.763) v2(36.347,-9.601) ; v2(49.657,-8.052) R7.1@51.34,-8.052 51.353,-8.039 P5.6@51.353,-3.81 ; v2(54.813,-36.347) 54.813,-35.916 57.158,-33.571 57.201,-33.571 U4.17@57.847,-33.571
  Bottom Layer w0.203: v2(36.347,-35.763) 36.932,-36.347 v2(54.813,-36.347) ; v2(36.347,-9.601) 48.108,-9.601 v2(49.657,-8.052)
A4: P5.8 R59.2 U4.20 | length 80.9
  Top Layer w0.203: v2(34.366,-33.122) v2(34.366,-10.465) ; P5.8@56.433,-3.81 56.433,-8.045 R59.2@56.427,-8.052 v2(57.836,-8.052) ; v2(59.334,-31.623) 59.347,-31.635 U4.20@59.347,-33.571
  Bottom Layer w0.203: v2(34.366,-33.122) 58.852,-33.122 59.334,-32.639 v2(59.334,-31.623) ; v2(34.366,-10.465) 55.423,-10.465 v2(57.836,-8.052)
A5: P5.10 R58.1 U4.21 | length 86.6
  Top Layer w0.203: v2(33.477,-33.071) v2(33.477,-10.516) ; v2(59.309,-30.81) 59.847,-31.348 U4.21@59.847,-33.571 ; v2(60.35,-8.052) R58.1@61.513,-8.052 P5.10@61.513,-3.81
  Bottom Layer w0.203: v2(33.477,-33.071) 33.934,-32.614 58.369,-32.614 58.702,-32.281 58.702,-31.418 v2(59.309,-30.81) ; v2(33.477,-10.516) 34.061,-11.1 56.464,-11.1 59.512,-8.052 v2(60.35,-8.052)
A6: J2.1 R22.1 U4.26 | length 92
  Top Layer w0.203: v2(6.477,-18.644) 6.477,-9.068 7.163,-8.382 R22.1@8.402,-8.382 8.402,-3.835 J2.1@8.427,-3.81 ; v2(37.281,-35.738) 37.281,-18.649 v2@37.287,-18.644 ; U4.26@62.347,-33.571 v2(62.347,-35.727) v2@62.357,-35.738
  Bottom Layer w0.203: v2(6.477,-18.644) 6.883,-18.644 7.518,-18.009 13.513,-18.009 14.148,-18.644 v2(37.262,-18.644) v2@37.287,-18.644 ; v2(37.281,-35.738) v2@62.357,-35.738
BLK: P1.7 U4.36 | length 24.9
  Top Layer w0.203: U4.36@67.847,-29.571 70.341,-29.571 v2(70.841,-30.071) ; v2(80.67,-29.285) 80.67,-17.932 P1.7@80.797,-17.805
  Bottom Layer w0.203: v2(70.841,-30.071) 71.627,-29.285 v2(80.67,-29.285)
CTR_OUT1: R1.1 U4.9 | length 32.9
  Top Layer w0.203: R1.1@36.068,-43.917 36.017,-43.866 36.017,-39.785 36.585,-39.218 49.657,-39.218 51.054,-37.821 51.054,-30.328 52.172,-29.21 52.918,-29.21 54.557,-27.571 U4.9@55.347,-27.571
CTR_OUT2: R5.1 U4.33 | length 19.6
  Top Layer w0.203: v2@61.488,-42.957 R5.1@61.488,-44.272 R5.1@61.538,-44.221 ; v2(67.843,-42.951) 67.847,-42.948 U4.33@67.847,-31.071
  Bottom Layer w0.203: v2(61.493,-42.951) v2(67.843,-42.951)
CTR_OUT3: R10.1 U4.34 | length 28.6
  Top Layer w0.203: v2(55.474,-43.002) 55.468,-43.008 R10.1@55.468,-44.272 R10.1@55.702,-44.038 ; U4.34@67.847,-30.571 68.824,-30.571 69.291,-31.039 v2(69.291,-42.24)
  Bottom Layer w0.203: v2(55.474,-43.002) 56.236,-42.24 v2(69.291,-42.24)
CTR_OUT4: R52.1 U4.8 | length 37.4
  Top Layer w0.203: R52.1@31.719,-43.911 R52.1@31.725,-43.917 31.725,-39.802 32.791,-38.735 49.454,-38.735 50.673,-37.516 50.673,-30.048 51.968,-28.753 52.908,-28.753 54.59,-27.071 U4.8@55.347,-27.071
DC: P1.6 U4.35 | length 25.4
  Top Layer w0.203: U4.35@67.847,-30.071 v2(69.771,-30.071) v2@69.774,-30.074 ; v2@83.185,-26.264 v2(83.21,-26.238) 83.21,-17.932 P1.6@83.337,-17.805
  Bottom Layer w0.203: v2(69.771,-30.071) 71.979,-27.864 81.585,-27.864 v2@83.185,-26.264
GND: C1.1 C2.1 C3.1 C4.1 C5.1 C6.1 C7.1 C9.2 C10.2 C13.2 C15.2 C18.2 C19.2 C20.2 C26.1 C27.1 C28.2 C29.2 C31.2 C39.1 C40.1 C41.2 C42.2 C47.1 C48.2 C49.1 C50.2 C55.2 C56.2 J2.2 J3.1 J4.1 J5.2 J11.1 J12.1 L4.2 P1.1 P2.3 P3.3 P4.2 P5.1 P5.3 P5.5 P5.7 P5.9 P7.3 P7.4 P7.5 P7.6 P7.7 P7.8 Q1.3 Q2.3 Q3.3 Q14.1 Q14.2 Q14.3 Q15.1 Q15.2 Q15.3 Q16.3 Q17.2 Q18.4 R3.1 R6.1 R11.1 R26.1 R34.1 R43.2 R45.2 R47.1 R53.1 R54.1 R55.1 R62.1 R67.1 R68.1 R72.2 U1.6 U1.9 U1.12 U1.15 U1.16 U1.21 U2.4 U2.5 U2.7 U4.12 U4.18 U4.31 U4.47 U4.60 U4.63 U5.2 U5.4 U6.6 U6.9 U6.12 U6.15 U6.16 U6.21 USB1.4 USB1.5 | length 40.7
  Top Layer w0.203: U4.12@55.347,-29.071 57.035,-29.071 v2(57.379,-28.727) ; v2(57.887,-31.699) 58.347,-32.159 U4.18@58.347,-33.571 ; U4.63@58.347,-21.071 58.347,-20.038 58.979,-19.406 v2(59.36,-19.406) 59.847,-19.892 U4.60@59.847,-21.071 ; U4.31@64.847,-33.571 64.847,-35.154 v2(64.999,-35.306) ; v2@66.262,-24.054 66.279,-24.071 U4.47@67.847,-24.071 ; U5.2@86.086,-11.923 U5.2@86.42,-11.923 U5.2@86.356,-11.987
  Bottom Layer w0.203: v2(33.528,-40.335) R62.1@34.392,-40.335 ; R43.2@44.062,-65.759 44.176,-65.759 46.099,-63.836 U6.6@46.099,-63.497 U6.21@46.099,-61.997 ; U6.9@44.599,-63.497 44.599,-63.066 U6.21@45.917,-61.747 ; U6.12@44.599,-59.997 44.599,-60.531 45.638,-61.57 v1(46.324,-61.57) ; U6.21@46.099,-61.345 U6.15@46.099,-59.997 ; U6.21@46.599,-61.497 U6.16@46.599,-59.997 ; U1.9@71.777,-61.059 71.777,-60.505 71.775,-60.503 U1.21@72.968,-59.309 ; U1.12@71.777,-57.559 71.777,-58.067 73.019,-59.309 U1.21@73.527,-59.309 ; C55.2@72.081,-68.986 72.21,-68.858 R45.2@72.21,-67.488 ; U1.6@73.277,-61.059 73.277,-59.559 U1.21@73.527,-59.309 ; U1.15@73.277,-57.559 73.277,-59.059 U1.21@73.527,-59.309 ; U1.16@73.777,-57.559 73.777,-59.059 U1.21@73.527,-59.309 ; C18.2@76.658,-67.488 R67.1@78.14,-67.488 R68.1@79.623,-67.488
  other v1: 77.927,-90.145 87.097,-90.043 75.921,-89.129 77.165,-87.173 50.216,-80.747 33.426,-80.112 68.555,-80.035 74.219,-80.035 77.089,-80.01 70.764,-79.934 65.913,-79.832 63.144,-79.807 72.517,-79.502 49.708,-78.74 32.055,-78.384 20.599,-76.124 18.415,-76.098 16.408,-76.073 21.463,-71.755 23.216,-70.307 21.387,-67.488 50.038,-61.773 21.463,-59.893 74.797,-59.614 78.892,-59.233 82.042,-58.547 36.424,-58.242 42.291,-58.141 80.747,-57.125 82.702,-56.54 78.74,-56.464 80.848,-54.991 52.527,-54.508 54.102,-53.492 42.215,-52.934 80.416,-52.172 82.601,-51.994 51.841,-51.791 84.963,-51.689 54.661,-51.638 35.509,-51.46 32.487,-51.435 80.848,-50.343 82.855,-49.987 27.356,-49.911 62.179,-49.708 67.793,-49.682 70.688,-49.632 75.717,-49.2 24.587,-48.997 84.836,-48.793 57.379,-48.539 79.908,-48.438 40.716,-48.26 44.933,-48.133 50.368,-48.108 63.652,-47.854 68.478,-47.676 74.346,-47.498 77.622,-47.244 84.785,-46.634 24.511,-46.558 72.187,-46.431 82.702,-46.177 80.289,-45.009 63.322,-44.882 77.495,-44.425 57.226,-44.018 24.333,-43.866 84.15,-43.688 22.733,-41.707 76.911,-41.605 87.478,-41.123 91.034,-41.021 94.488,-40.869 84.201,-40.284 97.536,-40.183 71.018,-39.675 95.275,-39.649 79.959,-39.345 92.075,-38.76 66.319,-38.583 75.54,-38.43 87.732,-37.389 82.956,-37.084 97.587,-36.576 32.487,-35.636 28.473,-35.255 71.018,-34.239 30.023,-33.96 24.206,-33.807 88.671,-33.731 92.735,-33.68 97.688,-33.604 75.844,-33.528 84.836,-33.528 80.01,-33.477 31.826,-33.426 28.219,-31.826 23.012,-31.699 30.988,-31.318 61.341,-31.064 78.054,-30.455 97.282,-30.455 74.651,-30.429 92.507,-30.124 14.478,-29.896 83.947,-29.007 10.566,-28.931 65.634,-28.194 92.151,-28.016 62.89,-27.915 86.081,-27.33 14.046,-27.254 24.435,-26.848 30.429,-26.848 97.231,-26.619 57.633,-26.467 77.953,-26.314 64.186,-26.264 60.909,-26.213 94.336,-26.213 88.9,-26.035 9.931,-25.476 29.693,-24.232 24.13,-23.622 67.462,-21.184 81.864,-21.184 77.673,-21.107 90.068,-20.549 13.183,-20.472 16.612,-20.447 40.716,-20.142 92.964,-20.117 23.571,-20.015 28.55,-19.914 38.583,-18.771 29.337,-16.688 84.76,-16.586 38.887,-16.358 69.063,-16.358 89.357,-16.281 47.676,-16.154 82.144,-16.154 24.486,-16.027 98.323,-15.062 15.113,-15.011 4.521,-14.402 85.471,-14.351 23.393,-14.072 93.802,-13.995 65.862,-13.919 57.048,-13.716 28.067,-13.386 70.815,-13.081 98.222,-12.192 96.876,-8.56 20.091,-8.306 89.891,-8.204 23.063,-8.077 3.937,-7.874 95.733,-5.639 2.565,-4.166 95.783,-2.54
  other v2: 86.004,-73.101 73.762,-72.568 75.336,-72.568 76.835,-72.542 70.815,-72.466 72.085,-72.466 85.217,-72.339 73.762,-71.196 66.262,-24.105
HUMID_EN: R71.1 U4.53 | length 48.2
  Top Layer w0.203: U4.53@63.347,-21.071 63.347,-18.137 v2(63.856,-17.628) ; R71.1@65.176,-44.45 v2(65.964,-44.45) ; v2(73.381,-44.45) v2(73.381,-17.628)
  Bottom Layer w0.203: v2(63.856,-17.628) v2(73.381,-17.628) ; v2(65.964,-44.45) v2(73.381,-44.45)
IIC_SCL: J3.2 R12.2 U4.58 | length 27.4
  Top Layer w0.203: U4.58@60.847,-21.071 60.847,-18.44 63.754,-15.532 v2(63.754,-6.68) ; J3.2@71.368,-3.81 71.368,-6.674 v2(71.374,-6.68)
  Bottom Layer w0.203: v2@60.847,-18.796 61.233,-18.796 R12.2@61.874,-18.154 ; v2(63.754,-6.68) v2(71.374,-6.68)
  other v2: 60.847,-18.847
IIC_SDA: J3.3 R13.2 U4.59 | length 30.5
  Top Layer w0.203: U4.59@60.347,-21.071 60.347,-17.25 62.992,-14.605 v2(62.992,-7.366) ; J3.3@73.908,-3.81 73.908,-6.649 v2(73.914,-6.655)
  Bottom Layer w0.203: R13.2@59.588,-18.129 59.588,-18.698 v2(60.347,-19.456) ; v2(62.992,-7.366) 73.203,-7.366 v2(73.914,-6.655)
IR: R17.1 U4.24 | length 32.8
  Top Layer w0.203: v2(38.78,-35.077) 38.78,-30.683 ; 38.78,-32.766 38.78,-30.683 ; R17.1@38.78,-28.245 38.78,-30.683 ; v2(61.347,-34.798) U4.24@61.347,-33.571
  Bottom Layer w0.203: v2(38.78,-35.077) 61.067,-35.077 v2(61.347,-34.798)
KEY1: P8.4 U4.27 | length 42.3
  Top Layer w0.203: v2(62.84,-31.496) 62.847,-31.503 U4.27@62.847,-33.571 ; v2(95.529,-29.286) P8.4@95.529,-22.651
  Bottom Layer w0.203: v2(62.84,-31.496) 83.541,-31.496 85.75,-29.286 86.487,-29.286 87.909,-29.286 v2(95.529,-29.286)
KEY2: P8.3 U4.4 | length 40.1
  Top Layer w0.203: U4.4@55.347,-25.071 57.25,-25.071 v2(57.252,-25.07) ; v2(92.989,-25.07) P8.3@92.989,-22.651
  Bottom Layer w0.203: v2(57.252,-25.07) 90.399,-25.07 ; 90.449,-25.019 90.399,-25.07 ; v2(92.989,-25.07) 90.399,-25.07
KEY3: P8.2 U4.22 | length 41
  Top Layer w0.203: U4.22@60.347,-33.571 60.347,-31.99 v2(60.35,-31.986) ; v2(90.449,-31.986) P8.2@90.449,-22.651
  Bottom Layer w0.203: v2(60.35,-31.986) v2(90.449,-31.986)
KEY4: P8.1 U4.23 | length 42.7
  Top Layer w0.203: v2(60.847,-36.334) U4.23@60.847,-33.571 ; v2(87.909,-34.925) P8.1@87.909,-22.651
  Bottom Layer w0.203: v2(60.847,-36.334) 77.572,-36.334 78.98,-34.925 v2(87.909,-34.925)
LED_CTRL1: U4.3
LED_CTRL2: U4.61
LED_STATUS: U4.2
MISO: P1.8 U4.56 | length 19.4
  Top Layer w0.203: U4.56@61.829,-21.054 U4.56@61.847,-21.071 61.847,-19.713 v2(62.306,-19.253) ; v2(78.13,-19.253) 78.13,-17.932 P1.8@78.257,-17.805
  Bottom Layer w0.203: v2(62.306,-19.253) v2(78.13,-19.253)
MOSI: P1.4 U4.55 | length 28.1
  Top Layer w0.203: U4.55@62.347,-21.071 v2@62.347,-19.949
  Bottom Layer w0.203: v2(62.357,-19.939) 86.284,-19.939 P1.4@88.417,-17.805
NetC1_2: C1.2 R14.2 U4.5 Y1.2 | length 10.8
  Top Layer w0.203: C1.2@48.685,-20.599 48.685,-23.979 Y1.2@48.692,-23.986 50.072,-23.986 51.156,-25.07 R14.2@52.698,-25.07 ; R14.2@52.629,-25 R14.2@52.698,-25.07 ; U4.5@55.347,-25.571 54.273,-25.571 53.772,-25.07 R14.2@52.698,-25.07
NetC2_2: C2.2 R14.1 U4.6 Y1.1 | length 10.6
  Top Layer w0.203: C2.2@48.761,-31.242 48.761,-28.255 Y1.1@48.692,-28.186 49.919,-28.186 51.105,-27 R14.1@52.629,-27 53.365,-27 54.294,-26.071 U4.6@55.347,-26.071
NetC3_2: C3.2 R15.2 U4.7 | length 13.7
  Top Layer w0.203: R15.2@48.736,-35.687 48.761,-35.662 C3.2@48.761,-33.579 48.812,-33.63 49.86,-33.63 50.343,-33.147 50.343,-29.693 51.841,-28.194 52.908,-28.194 53.507,-27.595 54.531,-26.571 U4.7@55.347,-26.571
NetC14_1: C14.1 C32.1 U1.4 | length 3.8
  Bottom Layer w0.254: U1.4@74.277,-61.059 74.277,-62.091 75.026,-62.84 C32.1@75.178,-62.84 75.153,-62.865 C14.1@75.153,-64.364
NetC14_2: C14.2 R29.2 | length 1.5
  Bottom Layer w0.254: R29.2@72.206,-64.34 73.629,-64.34 C14.2@73.653,-64.364
NetC15_1: C15.1 U6.3 | length 6.9
  Bottom Layer w0.254: U6.3@47.599,-63.497 47.599,-63.963 47.949,-64.313 48.788,-64.313 52.242,-67.767 C15.1@52.445,-67.767
NetC16_1: C16.1 HUMID3.2 L2.2 | length 16.8
  Bottom Layer w1.016: L2.2@1.905,-41.834 1.905,-37.561 HUMID3.2@2.941,-36.525 ; L2.2@2.002,-41.834 2.002,-42.47 4.668,-45.136 8.427,-45.136 10.408,-47.117 C16.1@10.408,-47.244
NetC17_1: C17.1 C46.2 L4.1 Q9.3 | length 62.3
  Bottom Layer w0.762: Q9.3@2.382,-47.199 Q9.3@2.382,-47.066
  Bottom Layer w1.016: C46.2@1.417,-58.471 1.417,-59.944 3.474,-62.001 3.474,-66.015 C17.1@1.95,-67.539 1.95,-72.669 L4.1@3.601,-74.32 3.601,-68.504 5.938,-66.167 7.716,-66.167 8.173,-65.71 8.173,-61.852 7.459,-61.138 4.846,-61.138 3.677,-59.969 3.677,-58.293 4.515,-57.455 7.335,-57.455 8.249,-56.54 8.249,-55.067 7.411,-54.229 1.676,-54.229 0.762,-53.315 0.762,-48.819 Q9.3@2.382,-47.199
NetC18_1: C18.1 U1.3 | length 5.7
  Bottom Layer w0.254: U1.3@74.777,-61.059 74.777,-61.372 75.566,-62.161 75.633,-62.161 76.658,-63.185 C18.1@76.658,-65.988
NetC23_1: C23.1 C46.1 R60.1 R61.1 | length 16.6
  Top Layer w0.762: C46.1@11.577,-58.471 C46.1@11.752,-58.646 ; R61.1@20.086,-57.328 R61.1@20.111,-57.302
  Bottom Layer w0.762: C23.1@11.577,-62.967 C23.1@11.653,-63.043 C46.1@11.653,-58.547 ; C46.1@11.577,-58.471 C46.1@11.653,-58.547 ; R60.1@22.702,-57.302 22.676,-57.328 R61.1@20.086,-57.328 18.767,-58.646 11.752,-58.646 C46.1@11.653,-58.547
NetC23_2: C23.2 HUMID2.2 | length 22.6
  Top Layer w1.016: C23.2@1.493,-63.043 1.518,-63.017 3.982,-63.017 4.896,-63.932 4.896,-68.351 1.645,-71.603 1.645,-76.556 3.728,-78.638 HUMID2.2@3.728,-80.493